# Altium PCB PCB1.PcbDoc
Units mm, origin at the board's own origin, x right, y up, seen from the top; angles counter-clockwise.
Board outline 53 x 72 mm, 2 copper layers (Top Layer, Bottom Layer), stack 0.57 mm thick; 33 components, 33 nets, 123 pads, 6 vias.
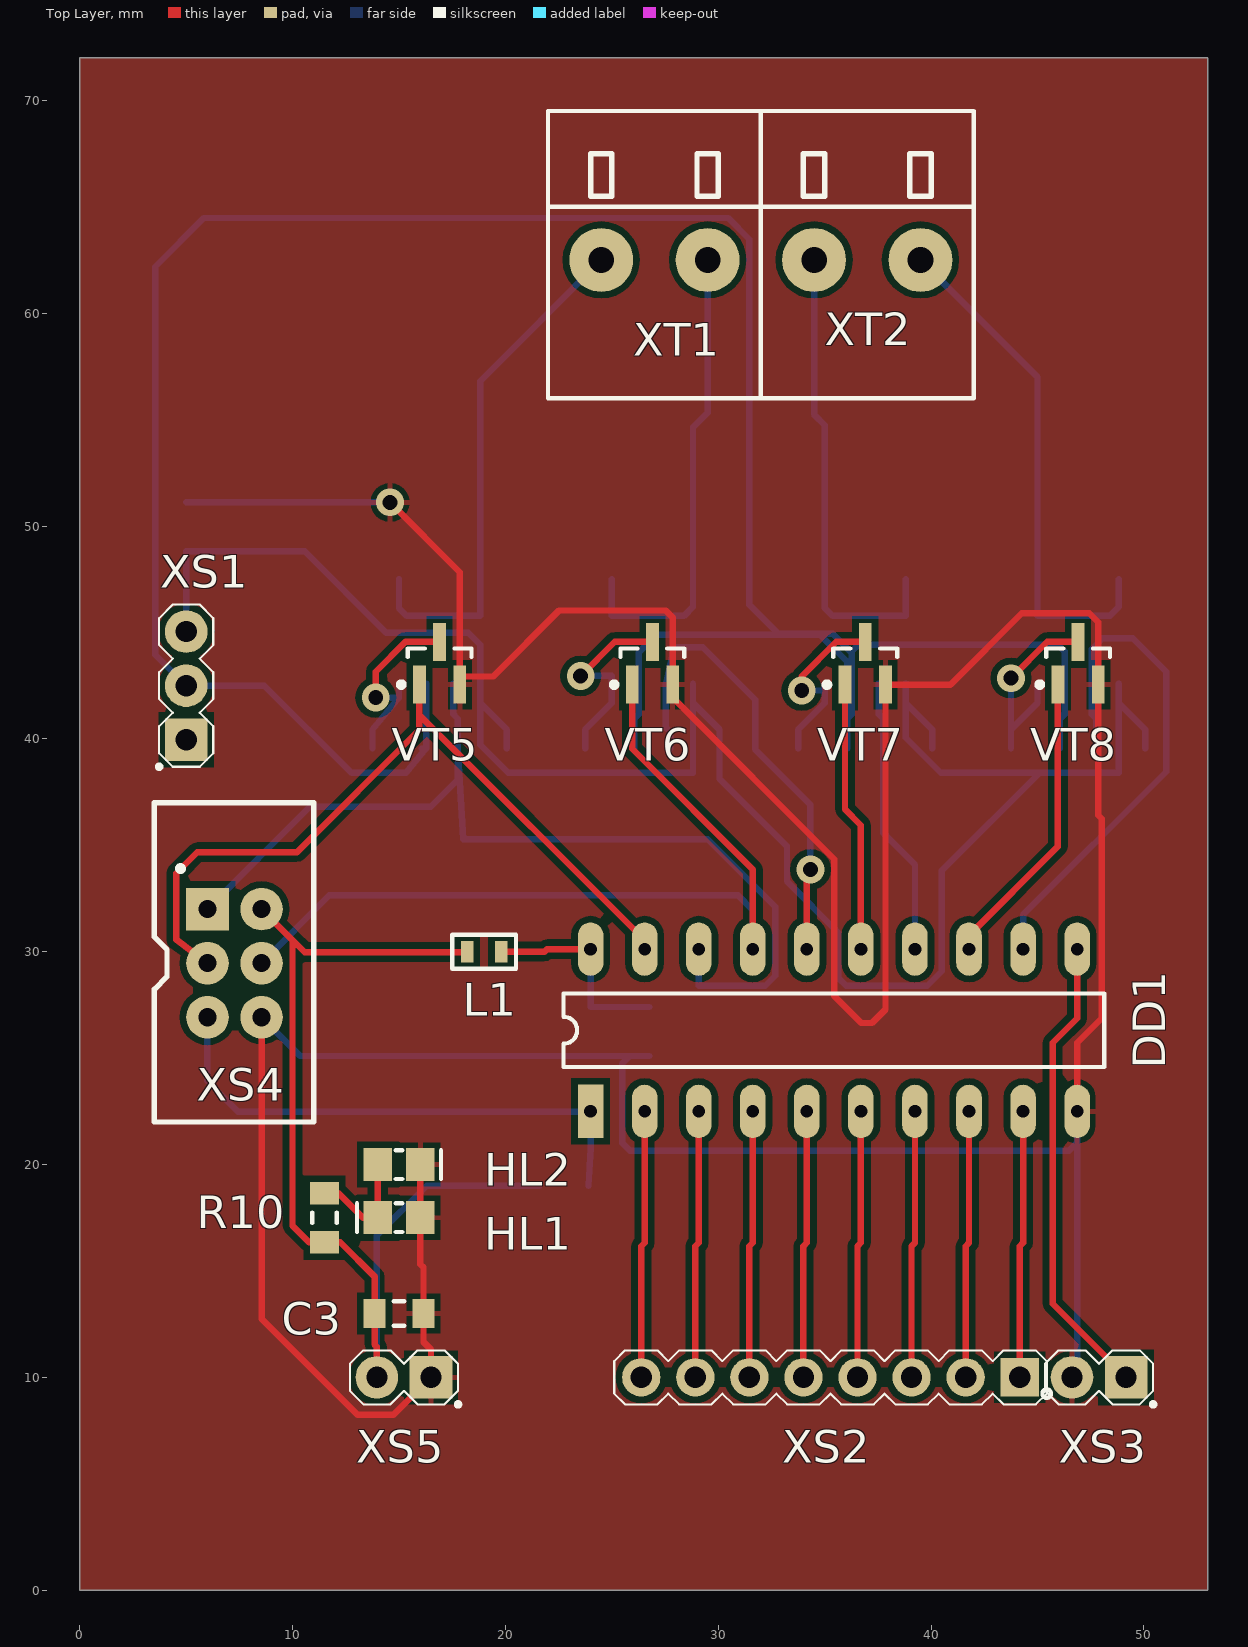
[diagram p0: Top Layer view]
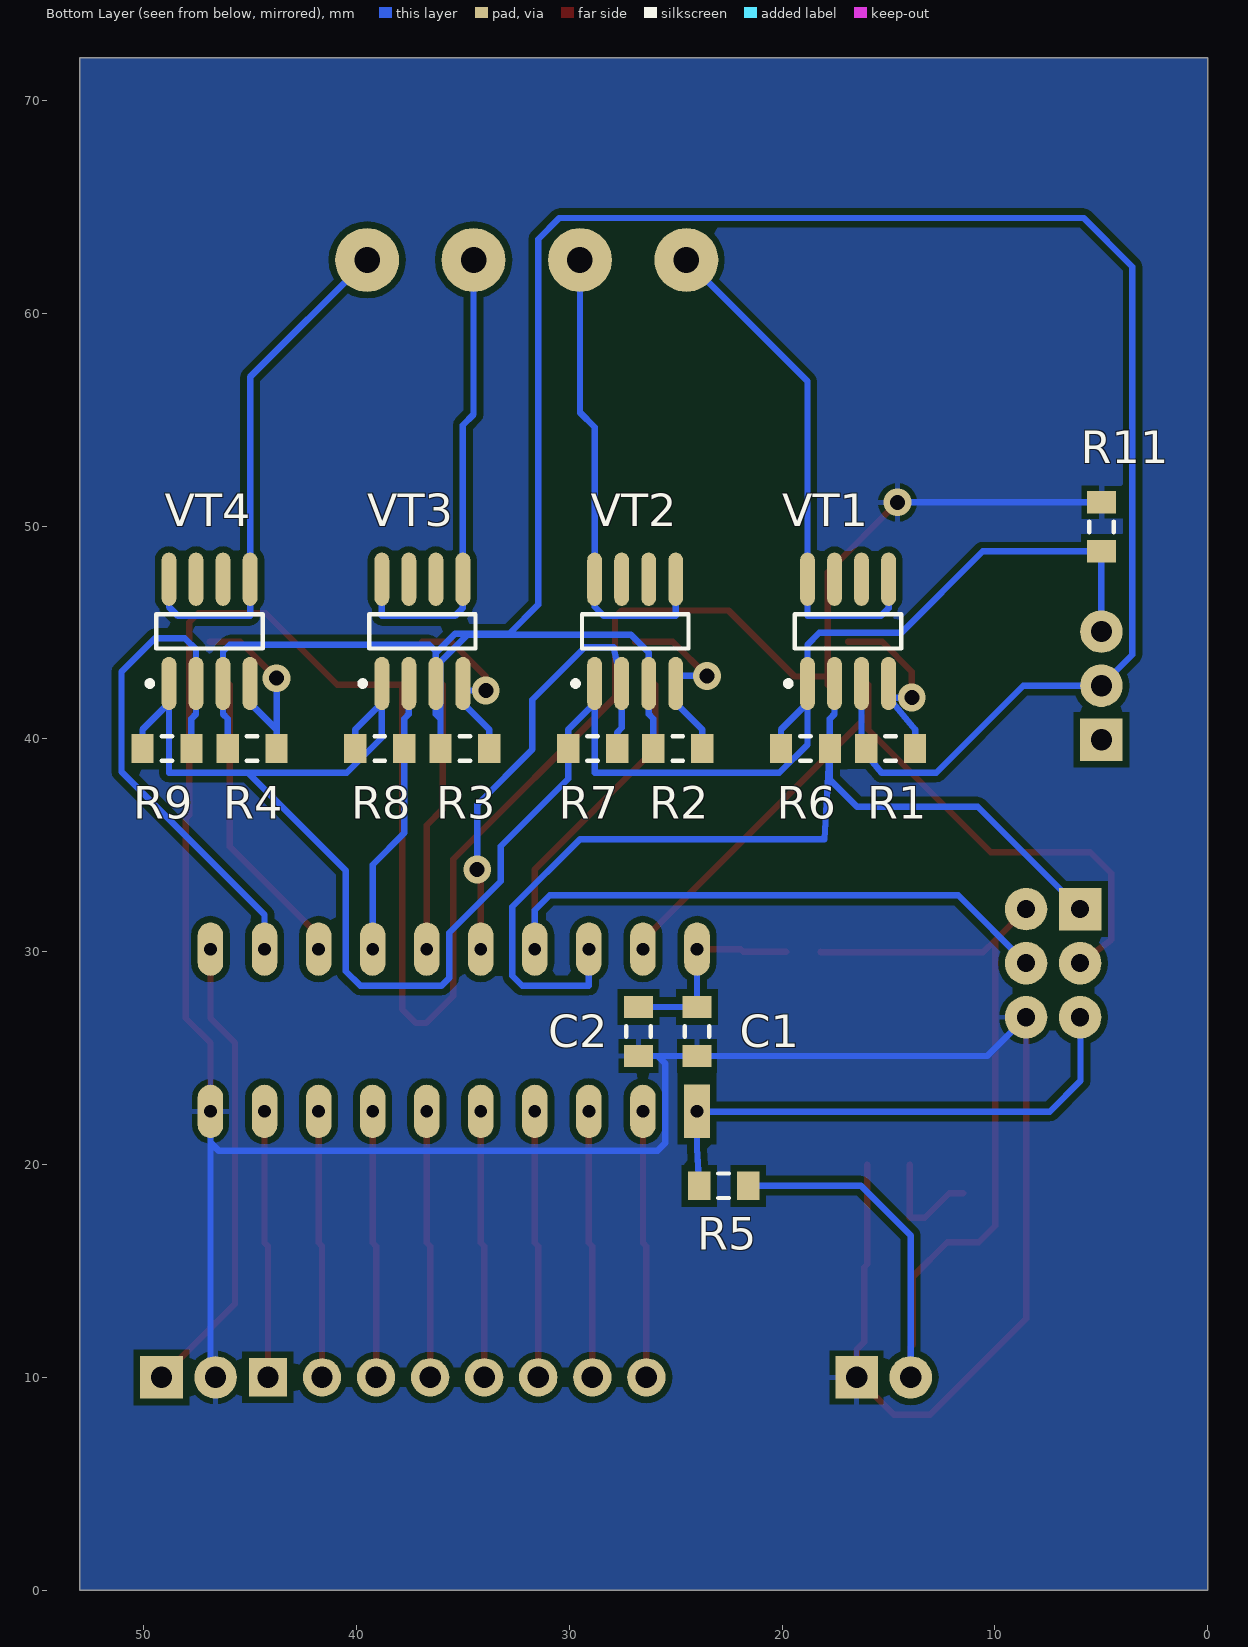
[diagram p1: Bottom Layer view, seen from below]

## Layer stack, top to bottom
Top Solder: solder mask 0.01, Solder Resist, Dk 3.5
Top Layer: signal copper 0.035
Dielectric 1: dielectric 0.5, FR-4, Dk 4.8
Bottom Layer: signal copper 0.035
Bottom Solder: solder mask 0.01, Solder Resist, Dk 3.5

## Board outline
0,0 53,0 53,72 0,72

## Design rules (kind name [scope] priority, off if disabled: settings)
Clearance [All] p1: gap=0.3
ComponentClearance pls_pbs [HasFootprint('PLS-*') vs HasFootprint('PLS-*')] p1: gap=0 collisioncheckmode=3 verticalgap=0 showdistances=FALSE
ComponentClearance 330-compClear [HasFootprint('330-*') vs HasFootprint('330-*')] p2: gap=0 collisioncheckmode=3 verticalgap=0 showdistances=FALSE
ComponentClearance [All] p3: gap=0.254 collisioncheckmode=3 verticalgap=0.254 showdistances=FALSE
HoleSize [All] p1: absolutevalues=TRUE maxlimit=2.54 minlimit=0.6 maxpercent=80.000 minpercent=20.000
MinimumAnnularRing [All] p1: minimumring=0.3
MinimumSolderMaskSliver [All] p1: minsoldermaskwidth=0
PolygonConnect [All] p1: connectstyle=Relief reliefconductorwidth=0.254 reliefentries=4 polygonreliefangle="90 Angle" airgapwidth=0.254
RoutingVias [All] p1: holewidth=0.7 width=1.3 viastyle="Through Hole" minholewidth=0.7 minwidth=1.3 maxholewidth=0.7 maxwidth=1.3
SMDNeckDown [All] p1: percent=50.000
SilkToSolderMaskClearance [IsPad] p1: minsilkscreentomaskgap=0 clearancetoexposedcopper=TRUE
SolderMaskExpansion [All] p1: expansion=0.102
Width [All] p1: maxlimit=0.6 minlimit=0.3 preferedwidth=0.3
25 further rules are at their usual default settings.

## Components (designator, comment, footprint, x,y, rotation, side; value= is the part's Value field where it differs from the comment)
C1 "1n" SMDRC0805 24,26.25 r90 bottom
C2 "10n" SMDRC0805 26.75,26.25 r90 bottom
C3 "10n" SMDRC0805 15,13 r180 top
DD1 "tiny2313" DIP20 24,22.5 r90 top
HL1 "KP-2012SURC" DIOMELF2012M 15,17.5 r180 top
HL2 "KP-2012SGC" DIOMELF2012M 15,20 r0 top
L1 "2500Ом@100МГц" MMZ1608 19,30 r180 top
R1 "1k" SMDRC0805 14.905,39.55 r180 bottom
R2 "1k" SMDRC0805 24.905,39.55 r180 bottom
R3 "1k" SMDRC0805 34.905,39.55 r180 bottom
R4 "1k" SMDRC0805 44.905,39.55 r180 bottom
R5 "100k" SMDRC0805 22.75,19 r180 bottom
R6 "1k" SMDRC0805 18.905,39.55 r180 bottom
R7 "1k" SMDRC0805 28.905,39.55 r180 bottom
R8 "1k" SMDRC0805 38.905,39.55 r180 bottom
R9 "1k" SMDRC0805 48.905,39.55 r180 bottom
R10 "330" SMDRC0805 11.5,17.5 r270 top
R11 "1" SMDRC0805 5,49.96 r90 bottom
VT1 "AO4612" SOIC-8-Narrow 16.905,45.05 r90 bottom
VT2 "AO4612" SOIC-8-Narrow 26.905,45.05 r90 bottom
VT3 "AO4612" SOIC-8-Narrow 36.905,45.05 r90 bottom
VT4 "AO4612" SOIC-8-Narrow 46.905,45.05 r90 bottom
VT5 "BCR108" SOT95P245X110-3M 16.905,43.55 r90 top
VT6 "BCR108" SOT95P245X110-3M 26.905,43.55 r90 top
VT7 "BCR108" SOT95P245X110-3M 36.905,43.55 r90 top
VT8 "BCR108" SOT95P245X110-3M 46.905,43.55 r90 top
XS1 "PLS-3" PLS-03 5,39.96 r90 top
XS2 "PLS-08R" PLS-08R1 44.16,10 r180 top
XS3 "PLS-02" PLS-02 49.16,10 r180 top
XS4 "SPI_ISP" IDC-06M 6,32 r0 top
XS5 "PLS-02" PLS-02 16.5,10 r180 top
XT1 "330-021-12" 330-021-12 29.5,62.5 r180 top
XT2 "330-021-12" 330-021-12 39.5,62.5 r180 top

## Footprints (in the part's own frame and the unit in brackets; to place one, negate y for a bottom-side part, rotate by r counter-clockwise, add the part's x,y. Pads: shape width x height; smd on the part's side, far side on the other; paste and mask are expansions set on the pad)
330-021-12 [mm]
  round 3 hole 1.2: 1(0,0) 2(5,0)
  silkscreen extent -2.5,-7 7.5,6.5, body extent -2.5,-6.5 7.5,6, height 12.6
DIOMELF2012M [mm] "MELF Diode, 2-Leads, Body 2,00x1,20mm, IPC Low Density"
  rect 1.35x1.55 smd: 1(-1,0) 2(1,0)
  silkscreen extent -0.15,-0.67 1.97,0.68, body extent -1,-0.6 1,0.6, height 1.2
DIP20 [mm]
  rect 2.5x1.2 hole 0.6: 1(0,0)
  oval 2.5x1.2 hole 0.6: 2(0,-2.54) 3(0,-5.08) 4(0,-7.62) 5(0,-10.16) 6(0,-12.7) 7(0,-15.24) 8(0,-17.78) 9(0,-20.32) 10(0,-22.86) 11(7.62,-22.86) 12(7.62,-20.32) 13(7.62,-17.78) 14(7.62,-15.24) 15(7.62,-12.7) 16(7.62,-10.16) 17(7.62,-7.62) 18(7.62,-5.08) 19(7.62,-2.54) 20(7.62,0)
  silkscreen extent 2.08,-24.13 5.54,1.27, body extent 0.63,-24.13 6.99,1.27, height 4
IDC-06M [mm]
  rect 2x2 hole 0.85: 1(0,0)
  round 2 hole 0.85: 2(2.54,0) 3(0,-2.54) 4(2.54,-2.54) 5(0,-5.08) 6(2.54,-5.08)
  silkscreen extent -2.5,-10 5,5, body extent -2.5,-10 5,5, height 8.4
MMZ1608 [mm]
  rect 0.6x1 smd: 1(-0.8,0) 2(0.8,0)
  silkscreen extent -1.5,-0.8 1.5,0.8, body extent -0.8,-0.4 0.8,0.4, height 0.9
PLS-02 [mm] "вилка на плату"
  rect 2x2 hole 1: 1(0,0)
  round 2 hole 1: 2(2.54,0)
  silkscreen extent -1.37,-1.27 3.81,1.37, body extent -1.27,-1.25 3.81,1.25, height 8.6
PLS-03 [mm] "вилка на плату"
  rect 2x2 hole 1: 1(0,0)
  round 2 hole 1: 2(2.54,0) 3(5.08,0)
  silkscreen extent -1.37,-1.27 6.35,1.37, body extent -1.27,-1.25 6.35,1.25, height 8.6
PLS-08R1 [mm] "угловая вилка на плату"
  rect 1.8x1.8 hole 1: 1(0,0)
  round 1.8 hole 1: 2(2.54,0) 3(5.08,0) 4(7.62,0) 5(10.16,0) 6(12.7,0) 7(15.24,0) 8(17.78,0)
  silkscreen extent -1.47,-1.27 19.05,1.27, body extent -1.28,-1.25 19.05,6, height 6.1
SMDRC0805 [mm] "Chip Resistor, 2-Leads, Body 2,00x1,20mm, IPC Low Density"
  rect 1.05x1.35 smd: 1(-1.15,0) 2(1.15,0)
  silkscreen extent -0.25,-0.57 0.25,0.58, body extent -1,-0.6 1,0.6, height 0.4
SOIC-8-Narrow [mm] "SOIC, 8-Leads, Body 4,90x3,90mm, Pitch 1,27mm, IPC Low Density"
  oval 2.5x0.7 smd: 1(-2.45,1.905) 2(-2.45,0.635) 3(-2.45,-0.635) 4(-2.45,-1.905) 5(2.45,-1.905) 6(2.45,-0.635) 7(2.45,0.635) 8(2.45,1.905)
  silkscreen extent -2.57,-2.5 0.8,2.93, body extent -2,-2.5 2,2.5, height 1.75
SOT95P245X110-3M [mm] "SOT23, 3-Leads, Body 2,90x2,45mm, Pitch 0,95mm, IPC Low Density"
  rect 1.8x0.6 smd: 1(-1,0.95) 2(-1,-0.95) 3(1,0)
  silkscreen extent -1.12,-1.5 0.7,1.92, body extent -0.7,-1.5 0.7,1.5, height 1.1

## Part data
C1: library part "Capacitor 0805 1n", "Generic capasitor non-polar"
C2 C3: library part "Capacitor 0805 10n", "Generic capasitor non-polar"
DD1: library part ATTINY2313A-PU, "Microcontroller 8-bit"
HL1: library part LED1_R, "Diod LED SMD Red"
HL2: library part LED1_G, "Diod LED SMD Green"
L1: library part MMZ1608A252B, "Феррит 2500Ом@100МГц"
R1 R2 R3 R4 R6 R7 R8 R9: library part "Resistor 0805 1k", "Generic resistor"
R5: library part "Resistor 0805 100k", "Generic resistor"
R10: library part "Resistor 0805 330", "Generic resistor"
R11: library part "Resistor 0805 1", "Generic resistor"
VT1 VT2 VT3 VT4: "p-n пара комплиментарная 60В"
VT5 VT6 VT7 VT8: library part BCR108E6327, "n-p-n цифровой"
XS1: library part Con3_M_PLS-3, "Male 3-pin connection"
XS2: library part "Con8_M PLS-08MR", "Male 8-pin connection"
XS3 XS5: library part Con2_M_PLS-02, "Male 2-pin connection"
XS4: library part "Con6_M IDC-06M_SPI", "SPI connector"
XT1 XT2: library part "Con2_D 330-021-12", "Demountable connection  2-pin"

## Via types
v1: diameter 1.3, hole 0.7, Top Layer to Bottom Layer, 6 vias

## Nets (pads, with @x,y where several pads share a name; then routed paths per layer and width w, separated by ;. In a path a pad name is that pad's centre, name@x,y a point inside that pad or via, vN(x,y) a via of type N, cw(c..) or ccw(c..) an arc to the next point about the centre after c; other vN are vias at no path point)
12V: XS1.1
GND: C1.1 C2.1 C3.1 DD1.10 HL1.1 HL2.2 R11.2 VT5.2 VT6.2 VT7.2 VT8.2 XS3.2 XS4.6 XS5.1 | length 197.8
  Top Layer w0.3: XS4.6 8.54,12.754 13.059,8.235 14.735,8.235 XS5.1 16.5,11.308 16.15,11.658 C3.1 16.15,15.169 16,15.319 HL1.1 HL2.2 ; v1(14.579,51.11) 17.855,47.834 VT5.2@17.855,42.931 ; VT5.2 VT5.2@17.855,42.931 ; DD1.10 46.86,25.719 48.019,26.879 48.019,36.239 47.855,36.404 VT8.2 47.855,45.483 47.435,45.903 44.26,45.903 40.907,42.55 VT7.2 37.855,27.285 37.22,26.65 36.716,26.65 35.446,27.92 35.446,34.35 27.855,41.941 VT6.2 27.855,45.7 27.525,46.03 22.518,46.03 19.419,42.931 VT5.2@17.855,42.931
  Bottom Layer w0.3: R11.2 v1(14.579,51.11) ; XS4.6 10.36,25.1 C1.1 25.844,25.1 ; C2.1 25.844,25.1 ; XS3.2 46.86,10.24 46.86,21.033 ; DD1.10 46.86,21.033 ; 25.844,25.1 25.489,24.745 25.489,21.011 25.845,20.656 46.483,20.656 46.86,21.033
MISO: DD1.18 R6.2 VT1.2 XS4.1 | length 47.9
  Bottom Layer w0.3: XS4.1 10.81,36.81 16.485,36.81 17.755,38.08 R6.2 ; VT1.2 17.54,41.165 17.755,40.95 R6.2 ; DD1.18 29.08,28.403 32.208,28.403 32.678,28.873 32.678,32.109 29.5,35.286 18.009,35.286 R6.2
MOSI: DD1.17 VT6.1 XS4.4 | length 41.3
  Top Layer w0.3: VT6.1 25.955,39.529 31.62,33.864 DD1.17
  Bottom Layer w0.3: XS4.4 11.724,32.644 30.925,32.644 31.62,31.949 DD1.17
NetC1_2: C1.2 C2.2 DD1.20 L1.1 | length 9.7
  Top Layer w0.3: L1.1 21.832,30 21.952,30.12 DD1.20
  Bottom Layer w0.3: DD1.20 C1.2 C2.2
NetDD1_2: DD1.2 XS2.8 | length 12.6
  Top Layer w0.3: XS2.8 26.38,16.16 26.54,16.32 DD1.2
NetDD1_3: DD1.3 XS2.7 | length 12.6
  Top Layer w0.3: XS2.7 28.92,16.16 29.08,16.32 DD1.3
NetDD1_4: DD1.4 XS2.6 | length 12.6
  Top Layer w0.3: XS2.6 31.46,16.16 31.62,16.32 DD1.4
NetDD1_5: DD1.5 XS2.5 | length 12.6
  Top Layer w0.3: XS2.5 34,16.16 34.16,16.32 DD1.5
NetDD1_6: DD1.6 XS2.4 | length 12.6
  Top Layer w0.3: XS2.4 36.54,16.16 36.7,16.32 DD1.6
NetDD1_7: DD1.7 XS2.3 | length 12.6
  Top Layer w0.3: XS2.3 39.08,16.16 39.24,16.32 DD1.7
NetDD1_8: DD1.8 XS2.2 | length 12.6
  Top Layer w0.3: XS2.2 41.62,16.16 41.78,16.32 DD1.8
NetDD1_9: DD1.9 XS2.1 | length 12.6
  Top Layer w0.3: XS2.1 44.16,16.16 44.32,16.32 DD1.9
NetDD1_11: DD1.11 XS3.1 | length 22
  Top Layer w0.3: DD1.11 46.86,26.879 45.708,25.726 45.708,13.452 XS3.1
NetDD1_12: DD1.12 R9.2 VT4.2 | length 24.9
  Bottom Layer w0.3: DD1.12 44.32,31.73 51.042,38.452 51.042,43.16 49.467,44.735 48.07,44.735 47.54,44.205 VT4.2 47.54,41.165 47.755,40.95 R9.2
NetDD1_13: DD1.13 VT8.1 | length 14.2
  Top Layer w0.3: DD1.13 41.78,30.765 45.955,34.94 VT8.1
NetDD1_14: DD1.14 R8.2 VT3.2 | length 13.2
  Bottom Layer w0.3: VT3.2 37.54,41.165 37.755,40.95 R8.2 37.755,35.577 39.24,34.092 DD1.14
NetDD1_15: DD1.15 VT7.1 | length 12.7
  Top Layer w0.3: VT7.1 35.955,36.691 36.7,35.946 DD1.15
NetDD1_16: DD1.16 R7.2 VT2.2 | length 22.6
  Top Layer w0.3: DD1.16 34.16,33.695 v1(34.329,33.864)
  Bottom Layer w0.3: R7.2 27.755,40.3 27.54,40.515 VT2.2 27.921,44.3 29.277,44.3 31.738,41.839 31.738,39.502 34.329,36.912 v1(34.329,33.864)
NetHL1_2: HL1.2 HL2.1 R10.1 | length 5.5
  Top Layer w0.3: R10.1 12.154,18.65 13.304,17.5 HL1.2 HL2.1
NetR1_1: R1.1 R2.1 R3.1 R4.1 VT1.3 VT2.3 VT3.3 VT4.3 XS1.2 | length 126.7
  Bottom Layer w0.3: R1.1 R1.1@16.27,39.55 ; VT1.3 R1.1@16.27,39.55 ; R2.1 26.055,40.95 26.27,41.165 VT2.3 26.27,44.055 27.115,44.9 34.773,44.9 36.055,43.618 36.055,40.95 ; R3.1 36.055,40.95 ; R4.1 46.055,40.95 46.27,41.165 VT4.3 46.27,44.113 45.953,44.43 36.587,44.43 36.27,44.113 36.27,44.038 ; R1.1@16.27,39.55 16.183,39.444 15.33,38.41 12.764,38.41 8.674,42.5 XS1.2 3.544,43.956 3.544,62.185 5.83,64.471 30.468,64.471 31.458,63.48 31.458,46.31 32.83,44.938 35.37,44.938 36.27,44.038 ; 36.055,40.95 36.27,41.165 VT3.3 36.27,44.038
NetR1_2: R1.2 VT1.4 VT5.3 | length 9.4
  Top Layer w0.3: v1(13.907,41.941) 13.907,43.16 15.304,44.557 16.905,44.557 VT5.3
  Bottom Layer w0.3: R1.2 13.755,40.442 VT1.4@15,41.941 ; v1(13.907,41.941) VT1.4@15,41.941 ; VT1.4 VT1.4@15,41.941
NetR2_2: R2.2 VT2.4 VT6.3 | length 9.4
  Top Layer w0.3: v1(23.534,42.957) 25.134,44.557 26.905,44.557 VT6.3
  Bottom Layer w0.3: v1(23.534,42.957) 25,42.957 VT2.4 25,41.687 23.755,40.442 R2.2
NetR3_2: R3.2 VT3.4 VT7.3 | length 9
  Top Layer w0.3: v1(33.922,42.271) 33.922,42.931 35.548,44.557 36.905,44.557 VT7.3
  Bottom Layer w0.3: R3.2 33.755,40.442 35,41.687 VT3.4@35,42.271 ; v1(33.922,42.271) VT3.4@35,42.271 ; VT3.4 VT3.4@35,42.271
NetR4_2: R4.2 VT4.4 VT8.3 | length 9.8
  Top Layer w0.3: v1(43.755,42.855) 45.457,44.557 46.905,44.557 VT8.3
  Bottom Layer w0.3: R4.2 43.755,40.442 ; v1(43.755,42.855) 43.755,40.442 ; VT4.4 45,41.687 43.755,40.442
NetVT1_5: VT1.5 VT1.8 XT1.2 | length 24.4
  Bottom Layer w0.3: VT1.5 15,46.144 15.368,45.776 18.81,45.776 VT1.8 18.81,56.81 XT1.2
NetVT2_5: VT2.5 VT2.8 XT1.1 | length 22.3
  Bottom Layer w0.3: VT2.5 25,45.776 28.385,45.776 28.81,46.201 VT2.8 28.81,54.641 29.5,55.331 XT1.1
NetVT3_5: VT3.5 VT3.8 XT2.2 | length 22.2
  Bottom Layer w0.3: XT2.2 34.5,55.242 35,54.742 VT3.5 35,46.146 35.37,45.776 38.81,45.776 VT3.8
NetVT4_5: VT4.5 VT4.8 XT2.1 | length 24.3
  Bottom Layer w0.3: XT2.1 45,57 VT4.5 45,45.776 48.388,45.776 48.81,46.199 VT4.8
PGND: R6.1 R7.1 R8.1 R9.1 R11.1 VT1.1 VT2.1 VT3.1 VT4.1 XS1.3 | length 96.5
  Bottom Layer w0.3: XS1.3 R11.1 10.568,48.81 14.39,44.989 18.251,44.989 18.81,44.43 VT1.1 VT1.1@18.81,41.687 ; R6.1 20.055,40.442 VT1.1@18.81,41.687 ; VT2.1 VT2.1@28.81,41.687 ; VT3.1 VT3.1@38.81,41.687 ; R8.1 40.055,40.442 VT3.1@38.81,41.687 ; VT4.1 VT4.1@48.81,41.687 ; R9.1 50.055,40.442 VT4.1@48.81,41.687 ; VT1.1@18.81,41.687 18.81,39.73 20.13,38.41 28.81,38.41 VT2.1@28.81,41.687 ; VT2.1@28.81,41.687 30.055,40.442 R7.1 30.055,38.131 33.228,34.957 33.228,33.312 35.643,30.897 35.643,28.765 36.005,28.403 39.815,28.403 40.501,29.088 40.501,33.813 45.098,38.41 ; VT3.1@38.81,41.687 38.81,40.05 40.45,38.41 45.098,38.41 ; 45.098,38.41 48.81,38.41 VT4.1@48.81,41.687
RES: DD1.1 R5.1 XS4.5 | length 25.1
  Bottom Layer w0.3: XS4.5 5.982,26.92 5.982,23.932 7.43,22.484 DD1.1@24,22.484 ; R5.1 24,20.781 DD1.1@24,22.484 ; DD1.1 DD1.1@24,22.484
SCK: DD1.19 VT5.1 XS4.3 | length 36.7
  Top Layer w0.3: XS4.3 4.534,30.562 4.534,33.686 5.525,34.676 10.203,34.676 15.955,40.429 15.955,41.121 ; VT5.1 15.955,41.121 ; DD1.19 26.54,30.536 15.955,41.121
VCC: C3.2 L1.2 R5.2 R10.2 XS4.2 XS5.2 | length 48.8
  Top Layer w0.3: XS4.2 9.995,30.545 ; XS5.2 13.96,11.435 13.85,11.545 C3.2 13.85,14.737 12.237,16.35 R10.2 10.77,16.35 9.995,17.125 9.995,30.545 ; L1.2 18.2,29.977 10.563,29.977 9.995,30.545
  Bottom Layer w0.3: XS5.2 13.96,16.668 16.297,19.005 21.6,19.005 R5.2
pads on no net: VT1.6 VT1.7 VT2.6 VT2.7 VT3.6 VT3.7 VT4.6 VT4.7

## Polygon pours and split planes (outlines as drawn)
GND on Top Layer "TopGND" (solid, remove dead copper, pour order 2): 0,0 0,72 53,72 53,0
GND on Bottom Layer "BotGND" (solid, remove dead copper, pour order 4): 0,0 0,72 53,72 53,0

## Silkscreen, mask and mechanical layers (free items; w line width, h text height)
Mechanical 3:
  the board outline again, w1
Mechanical 16:
  lines w0.254: 89.524,-97.518 154.543,-97.518 ; 89.524,-92.523 154.543,-92.523 ; 89.524,-87.528 154.543,-87.528 274.507,-87.528 ; 89.524,-82.532 154.543,-82.532 ; 89.524,-77.537 154.543,-77.537 ; 89.524,-72.542 154.543,-72.542 ; 89.524,-67.505 154.543,-67.505 ; 89.524,-62.509 154.543,-62.509 274.507,-62.509 ; 89.524,-57.514 154.543,-57.514 ; 96.508,-72.542 96.508,-47.524 ; 106.541,-102.513 106.541,-47.524 ; 129.526,-102.513 129.526,-47.524 ; 144.511,-102.513 144.511,-47.524 ; 154.543,-102.513 154.543,-47.524 ; 154.543,-52.519 89.524,-52.519 89.524,-47.524 ; 224.515,-102.513 224.515,-62.509 ; 224.515,-82.532 274.507,-82.532 ; 224.515,-67.505 274.507,-67.505 ; 229.51,-82.532 229.51,-67.505 ; 234.505,-82.532 234.505,-67.505 ; 239.542,-82.532 239.542,-62.509 ; 244.537,-87.528 244.537,-82.532 ; 259.522,-82.532 259.522,-62.509 ; 89.524,-47.524 89.524,-102.513 274.507,-102.513 274.507,-47.524 154.543,-47.524 ; 89.524,-47.524 154.543,-47.524 ; -12.5,-102.5 274.5,-102.5 274.5,97.5 -12.5,97.5 -12.5,-102.5
  text "Изм." at 90,-71.5 h4.5
  text "Лист" at 97,-71.5 h4.5
  text "№ докум." at 107,-71.5 h4.5
  text "Подп." at 130,-71.5 h4.5
  text "Дата" at 145,-71.5 h4.5
  text "Разраб." at 90,-76.5 h4.5
  text ".Print_Date" at 145.5,-76.5 h2
  text ".Print_Scale" at 241.5,-80.5 h5
  text "Пров." at 90,-81.5 h4.5
  text "Т.контр." at 90,-86.5 h4.5
  text ".Printout_Name" at 156.5,-86.5 h5
  text "Н. конт" at 90,-96.5 h4.5
  text "Утв." at 90,-101.5 h4.5
  text ".Pcb_File_Name_No_Path" at 155.5,-101.5 h8

## Dimensions
0,0 to 53,0 on Mechanical 16
53,0 to 53,72 on Mechanical 16